# Altium PCB SuperCap-NEW_V2.1.2.PcbDoc (part 2 of 2)
Units mm, origin at the board's own origin, x right, y up, seen from the top; angles counter-clockwise.
Board outline 100.01 x 70.01 mm, 4 copper layers (Top Layer, POWER, GND, Bottom Layer), stack 0.603 mm thick; 121 components, 72 nets, 389 pads, 530 vias.
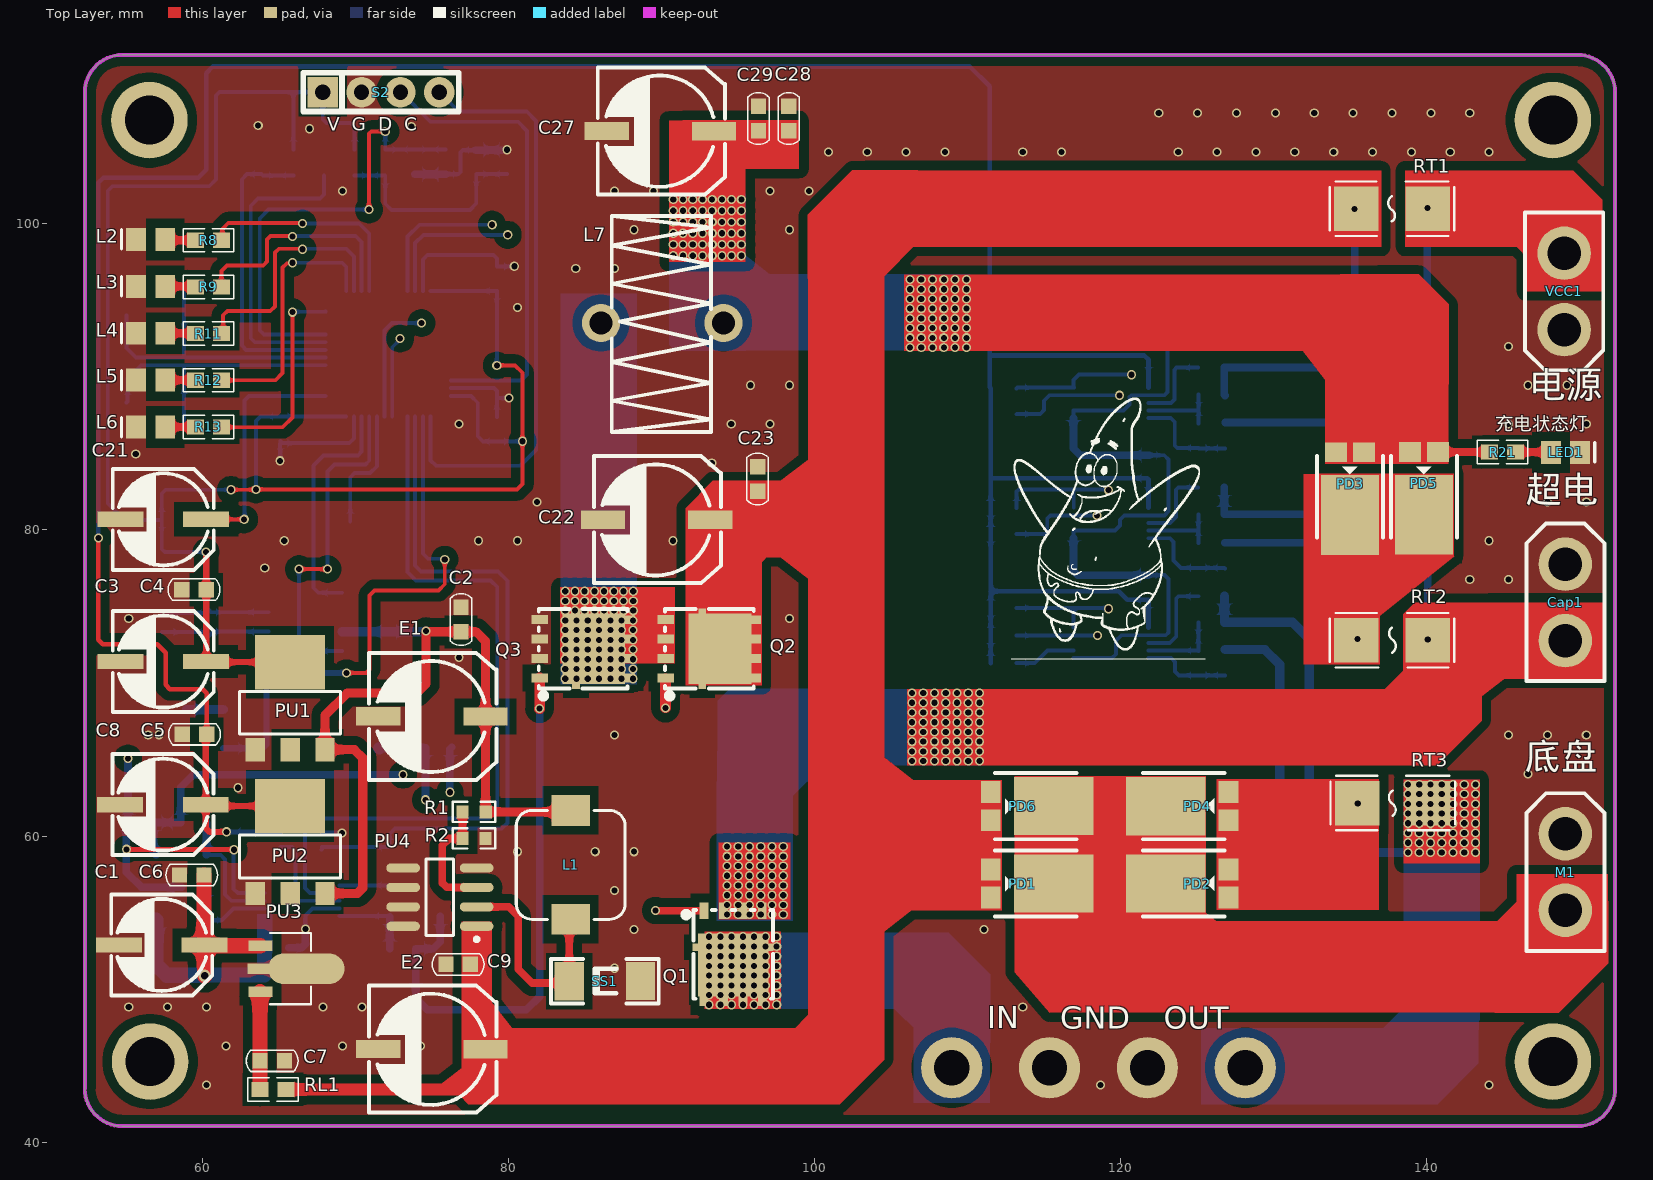
[diagram p0: Top Layer view]

## Silkscreen, mask and mechanical layers (free items; w line width, h text height) (continued)
Bottom Solder: (continued)
  rectangle: 94.234,54.864 97.993,59.309
  rectangle: 106.375,64.897 110.795,69.342
  rectangle: 138.786,58.928 143.18,63.373
  lines w3: 108.204,67.132 108.509,66.827
  lines w4: 95.123,51.206 107.239,51.206 108.974,49.471 108.974,44.856 ; 128.151,44.856 138.913,44.856 141.021,46.965 ; 141.097,47.396 141.097,60.833